# EAGLE board shunt-dip (EAGLE 9.3.0)
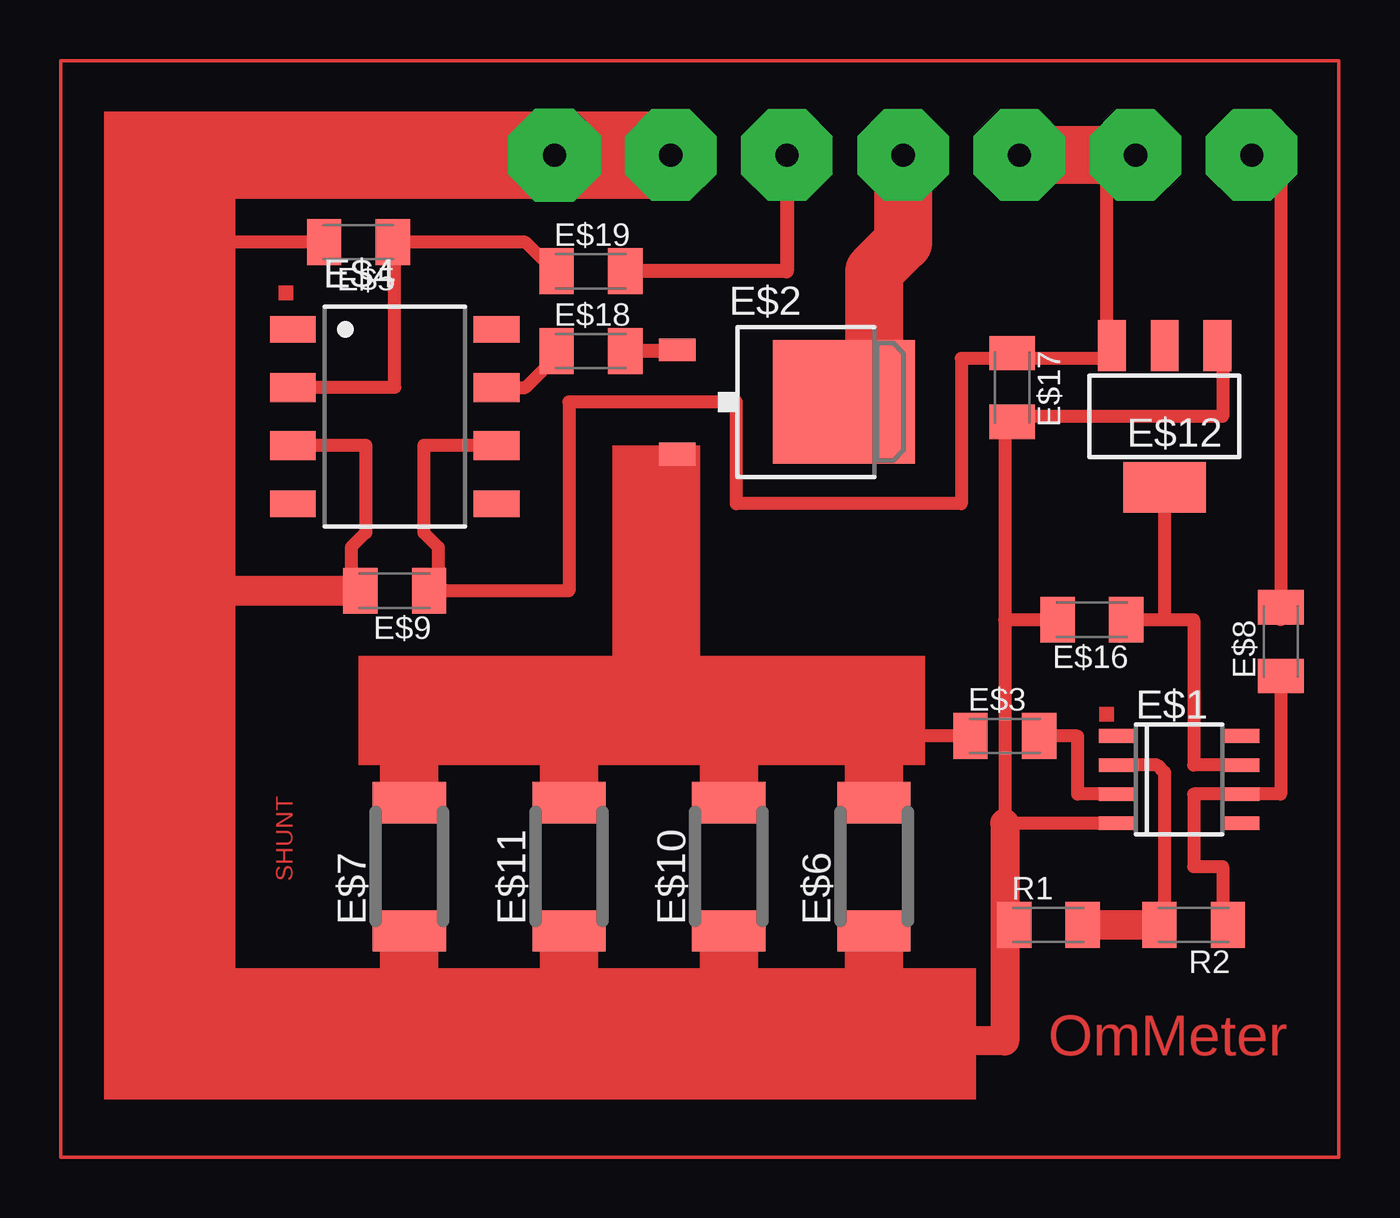
[diagram p0: board, top side]

No outline drawn. Coordinates in mm, seen from the top.
Copper layers (1*16): Top 0.035mm / dielectric 1.5mm / Bottom 0.035mm
Design rules "default": minimum track width 6mil, minimum drill 0.35mm, track to track 6mil, track to pad 6mil, pad to pad 6mil, via to via 6mil, smd to smd 6mil, copper to edge 40mil, drill to drill 6mil, minimum pad ring 10mil, minimum via ring 8mil, stop-mask expansion 4mil, vias tented up to drill 0mil, thermal gap 10mil

## Footprints (pad centres in the part's own frame; a part is rotated, then mirrored left to right if it is on the bottom)
SOIC8 = smd 0.6 x 1.5: 1 -1.905,-2.75; 2 -0.635,-2.75; 3 0.635,-2.75; 4 1.905,-2.75; 5 1.905,2.75; 6 0.635,2.75; 7 -0.635,2.75; 8 -1.905,2.75
TO252 = smd 1 x 1.6: 1 -2.28,-4.8; 2 2.28,-4.8 | smd 5.4 x 6.2: 3 0,2.5
C1206K = smd 1.5 x 2: 1 -1.5,0; 2 1.5,0
DIP8 = smd 1.16 x 2: 1 -3.81,-4.45; 4 3.81,-4.45; 5 3.81,4.45; 8 -3.81,4.45 | smd 1.27 x 2: 2 -1.27,-4.45; 3 1.27,-4.45; 6 1.27,4.45; 7 -1.27,4.45
R2512 = smd 1.8 x 3.2: 1 -2.8,0; 2 2.8,0
SOT223 = smd 1.219 x 2.235: 1 -2.311,-3.099; 2 0,-3.099; 3 2.311,-3.099 | smd 3.6 x 2.2: 4 0,3.099

## Placement (x,y rotation side)
E$1  mcp601  [SOIC8]  79.38,19.68 270 top
E$2  AOD472  [TO252]  62.23,36.2 270 top
E$3  1k  [C1206K]  71.75,21.59 0 top
E$4  IR4427  [DIP8]  45.09,35.56 270 top
E$5  15k  [C1206K]  43.5,43.18 180 top
E$6  0.02R  [R2512]  66.04,15.88 90 top
E$7  0.02R  [R2512]  45.72,15.88 90 top
E$8  1k  [C1206K]  83.82,25.72 90 top
E$9  1mk  [C1206K]  45.09,27.94 180 top
E$10  0.02R  [R2512]  59.69,15.88 90 top
E$11  0.02R  [R2512]  52.7,15.88 90 top
E$12  1117  [SOT223]  78.74,35.56 180 top
E$16  1mk  [C1206K]  75.56,26.67 180 top
E$17  1mk  [C1206K]  72.07,36.83 270 top
E$18  1k  [C1206K]  53.66,38.42 0 top
E$19  1k  [C1206K]  53.66,41.91 0 top
R1  330R  [C1206K]  73.66,13.34 0 top
R2  22K  [C1206K]  80.01,13.34 180 top

## Library data of the parts
E$1 E$2 = linear
E$3 E$5-E$11 E$16-E$19 R1 R2 = rcl
E$4 = avago
E$12 = transistor-pnp

## Tracks (layer width: path | path; a pad name or v marks a point on that pad's centre or on a via)
S$1
  Top 0.559: 78.74,32.77 78.74,26.67 | 81.92,20.32 80.01,20.32 80.01,26.67 78.74,26.67 | 78.74,26.67 76.83,26.67
S$2
  Top 0.559: 81.28,13.34 81.28,15.88 80.01,15.88 80.01,19.05 83.82,19.05 83.82,24.13
S$3  (via drill 1.02 pad 4.06)
  other vias: 52.07,46.99
S$4
  Top 0.559: 40.64,36.83 45.09,36.83 45.09,43.18 50.8,43.18 52.07,41.91
S$5  (via drill 1.02 pad 4)
  other vias: 77.47,46.99
S$6
  Top 0.559: 76.83,17.78 71.75,17.78 71.75,26.67 | 71.75,35.56 71.75,26.67 | 74.3,26.67 71.75,26.67
  Top 1.27: 71.75,17.78 71.75,8.26 67.94,8.26
S$7
  Top 0.152: 86.36,3.17 30.48,3.17 30.48,51.12 86.36,51.12 86.36,3.17
S$8
  Top 0.559: 40.64,34.29 43.81,34.29 43.81,30.48 43.18,29.84 43.18,27.94
S$9
  Top 0.559: 76.83,19.05 74.93,19.05 74.93,21.59 73.66,21.59
S$10  (via drill 1.02 pad 4)
  Top 0.559: 49.53,34.29 46.35,34.29 46.35,30.48 46.99,29.84 46.99,27.94 52.7,27.94 52.7,36.2 60.01,36.2 60.01,31.75 69.85,31.75 69.85,38.1 76.2,38.1 76.2,46.99
  Top 2.54: 77.47,46.99 76.2,46.99 v72.39,46.99
S$11
  Top 0.559: 78.74,13.34 78.74,20 78.42,20.32 76.52,20.32
S$12
  Top 0.559: 49.53,36.83 50.8,36.83 52.07,38.1 52.07,38.73
S$13
  Top 0.559: 41.91,43.18 36.83,43.18
S$14
  Top 0.559: 81.28,38.42 81.28,35.56 72.07,35.56
S$16  (via drill 1.02 pad 4)
  Top 0.559: v82.55,46.99 83.82,45.72 83.82,26.67
S$17
  Top 0.61: 57.47,38.42 54.93,38.42
S$18
  Top 0.559: 70.48,21.59 66.67,21.59
S$19  (via drill 1.02 pad 4)
  Top 0.61: 54.93,41.91 62.23,41.91 v62.23,46.99
S$21  (via drill 1.02 pad 4)
  other vias: 57.15,46.99
S$23  (via drill 1.02 pad 4)
  Top 2.54: v67.31,46.99 67.31,43.18 66.04,41.91 66.04,35.56
(copper drawn outside any net)
  shapes: Top area x17

## Text on the board
Top: SHUNT | OmMeter